# Altium PCB Плата2.PcbDoc
Units mm, origin at the board's own origin, x right, y up, seen from the top; angles counter-clockwise.
Board outline 64.1 x 28.1 mm, 2 copper layers (Top Layer, Bottom Layer); 23 components, 27 nets, 132 pads, 0 vias.
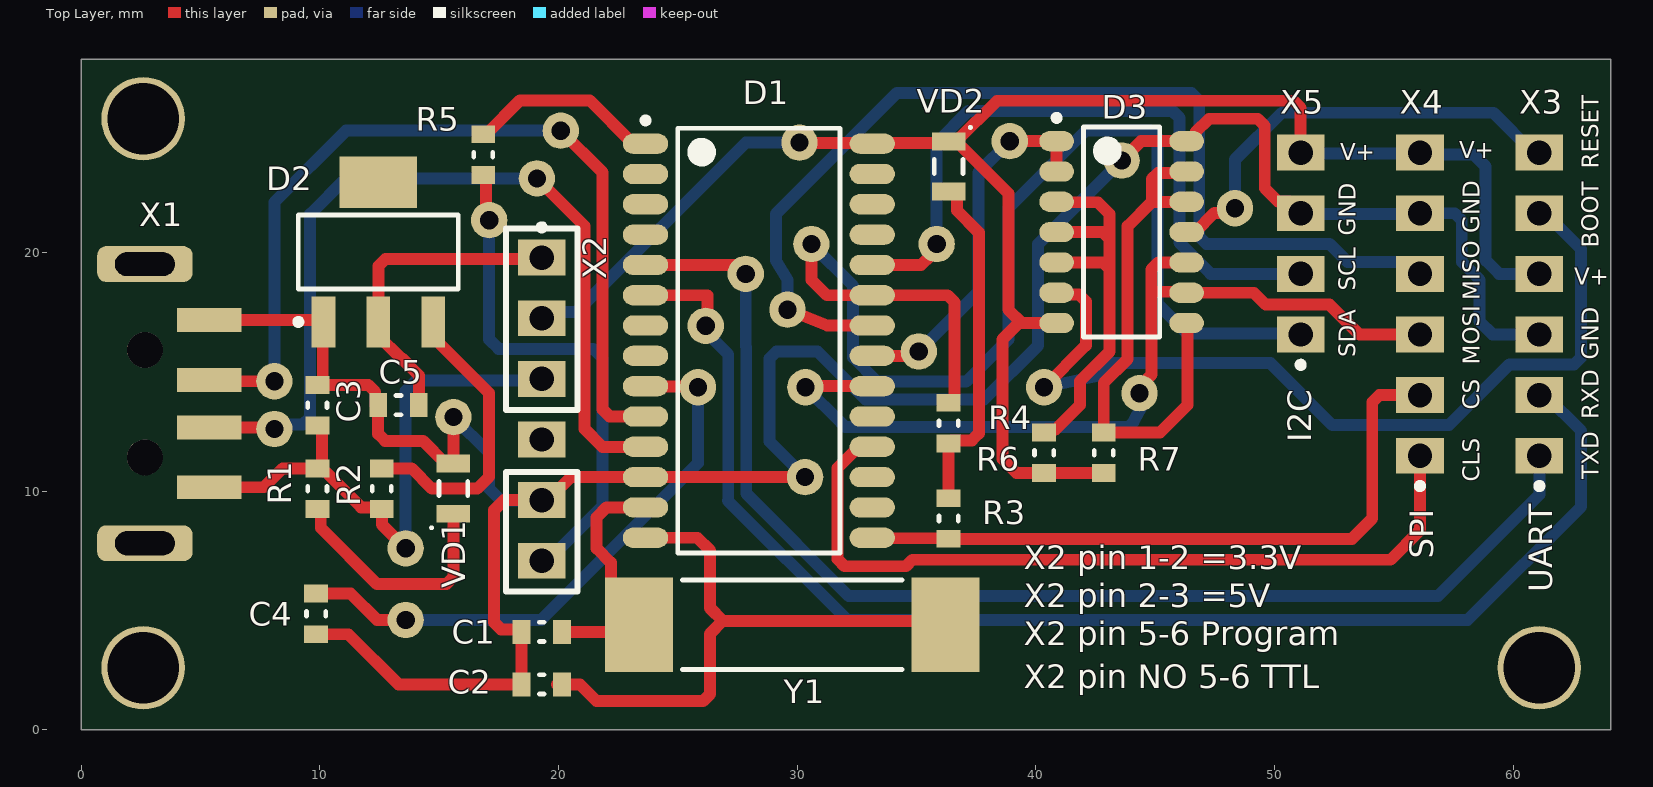
[diagram p0: Top Layer view]
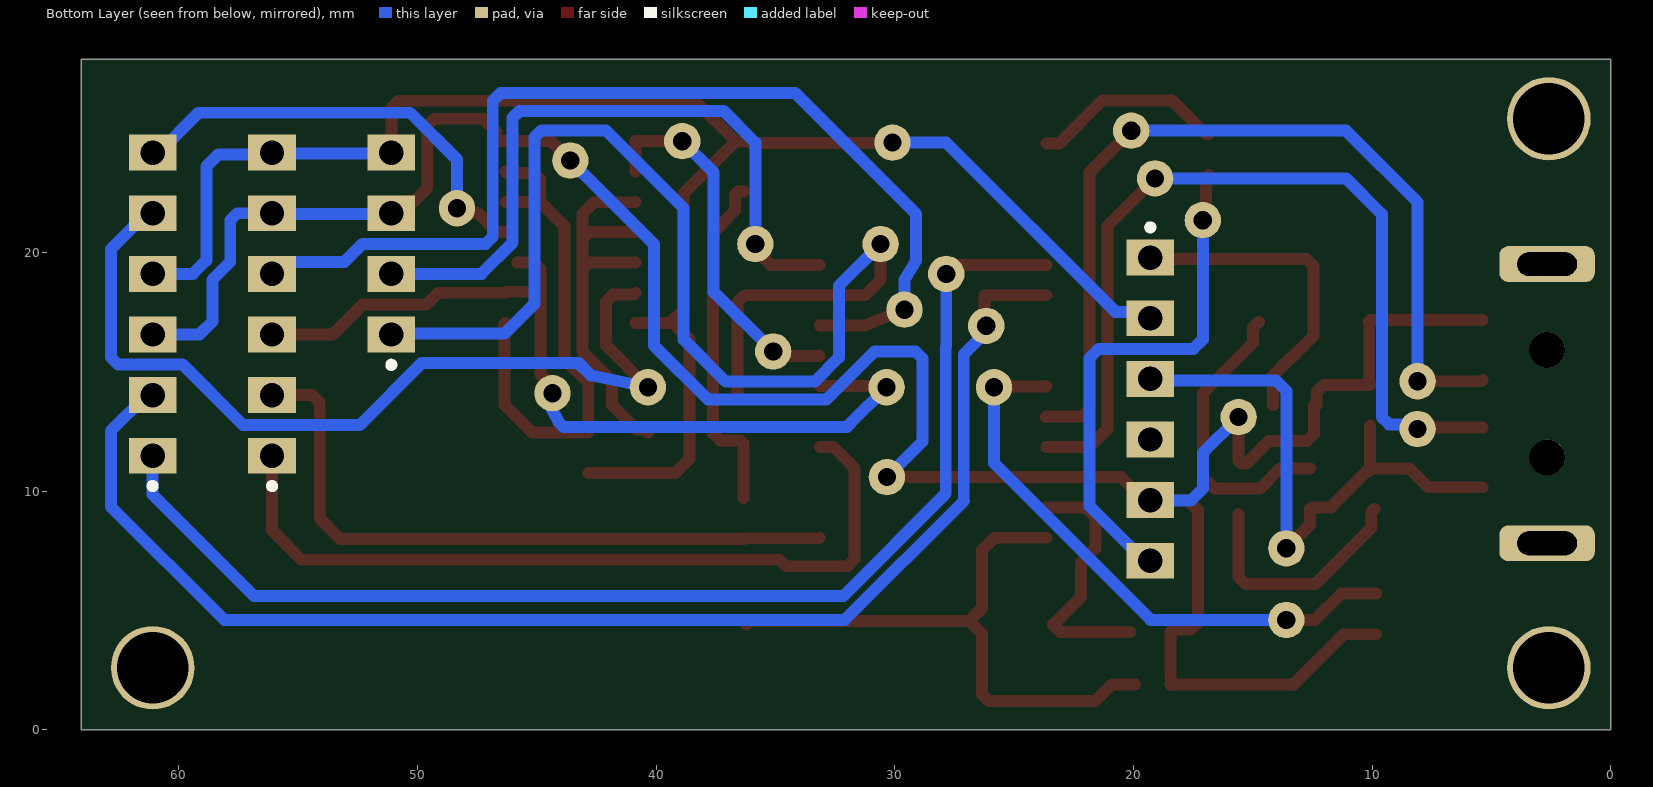
[diagram p1: Bottom Layer view, seen from below]

## Layer stack, top to bottom
Top Solder: solder mask 0.0102, Solder Resist, Dk 3.5
Top Layer: signal copper 0.0356
Dielectric 1: dielectric 0.32, FR-4, Dk 4.8
Bottom Layer: signal copper 0.0356
Bottom Solder: solder mask 0.0102, Solder Resist, Dk 3.5

## Board outline
0,0 64.1,0 64.1,28.1 0,28.1

## Design rules (kind name [scope] priority, off if disabled: settings)
Clearance [All] p1: gap=0.254 ignorepadtopadclearanceinfootprint=FALSE
PolygonConnect [All] p1: connectstyle=Relief reliefconductorwidth=0.254 reliefentries=4 polygonreliefangle="90 Angle" airgapwidth=0.254
RoutingVias [All] p1: holewidth=0.711 width=1.27 viastyle="Through Hole" minholewidth=0.711 minwidth=1.27 maxholewidth=0.711 maxwidth=1.27
SolderMaskExpansion [All] p1: expansion=0.102 istentingtop=FALSE
Width [All] p1: maxlimit=0.5 minlimit=0.5 preferedwidth=0.5 minimp=50.000000 maximp=50.000000 favimp=50.000000
30 further rules are at their usual default settings.

## Components (designator, comment, footprint, x,y, rotation, side; value= is the part's Value field where it differs from the comment)
C1 "15" 0603 19.3,4.1 r0 top
C2 "15" 0603 19.3,1.9 r0 top
C3 "0.01" 0603 9.9,13.6 r270 top
C4 "0.01" 0603 9.85,4.85 r270 top
C5 "0.01" 0603 13.3,13.6 r0 top
D1 "CH341A" SOP127-28N 28.4,16.3 r0 top
D2 "AMS1117-3.3L" SOT223-4N 12.454,20.011 r90 top
D3 "SN7400" SOP127-14N 43.6,20.85 r0 top
R1 "2.2k" 0603 9.9,10.1 r90 top
R2 "10" 0603 12.6,10.1 r90 top
R3 "2.2k" 0603 36.35,8.85 r270 top
R4 "2.2k" 0603 36.35,12.85 r90 top
R5 "2.2k" 0603 16.85,24.1 r270 top
R6 "2.2k" 0603 40.35,11.6 r270 top
R7 "2.2k" 0603 42.85,11.6 r270 top
VD1 "LED SMD 0805" "Led Diode 0805" 15.6,10.1 r90 top
VD2 "LED SMD 0805" "Led Diode 0805" 36.35,23.6 r270 top
X1 "USB" "USB-ASM (DS1098-B)" 2.675,13.661 r270 top
X2 "PLC-6" PLC-6 19.3,19.78 r270 top
X3 "UART" PLC-6 61.1,11.48 r90 top
X4 "SPI (Flash)" PLC-6 56.1,11.48 r90 top
X5 "I2C(Flash)" PLC-4 51.1,16.56 r90 top
Y1 "12МГц" HC-49SM 29.8,4.4 r0 top

## Footprints (in the part's own frame and the unit in brackets; to place one, negate y for a bottom-side part, rotate by r counter-clockwise, add the part's x,y. Pads: shape width x height; smd on the part's side, far side on the other; paste and mask are expansions set on the pad)
0603 [mm] "Chip Resistor, 2-Leads, Body 1,63x0,93mm, IPC Medium Density"
  rect 0.75x1 smd: 1(-0.85,0) 2(0.85,0)
  silkscreen extent -0.1,-0.4 0.1,0.4, body extent -0.85,-0.48 0.85,0.47, height 0.45
HC-49SM [mm] "Chip BQ"
  rect 2.85x3.95 smd: 1(-6.425,0) 2(6.425,0)
  silkscreen extent -4.6,-1.88 4.6,1.88, body extent -7.5,-1.9 7.5,1.9, height 5
"Led Diode 0805" [mm] "Chip Diode, 2-Leads, Body 2,05x1,25mm, IPC Medium Density"
  rect 0.75x1.4 smd: A(-1.05,0) K(1.05,0)
  silkscreen extent -1.69,-0.6 0.3,0.96
PLC-4 [mm]
  rect 1.5x2 hole 1.02: 1(0,0) 2(2.54,0) 3(5.08,0) 4(7.62,0)
  silkscreen extent -1.4,-0.13 -1.14,0.13
PLC-6 [mm]
  rect 1.5x2 hole 1.02: 1(0,0) 2(2.54,0) 3(5.08,0) 4(7.62,0) 5(10.16,0) 6(12.7,0)
  silkscreen extent -1.4,-0.13 -1.14,0.13
SOP127-14N [mm] "SOP, 14-Leads, Body 8,65x3,90mm, Pitch 1,27mm, IPC Medium Density"
  oval 1.45x0.85 smd: 1(-2.725,3.81) 2(-2.725,2.54) 3(-2.725,1.27) 4(-2.725,0) 5(-2.725,-1.27) 6(-2.725,-2.54) 7(-2.725,-3.81) 8(2.725,-3.81) 9(2.725,-2.54) 10(2.725,-1.27) 11(2.725,0) 12(2.725,1.27) 13(2.725,2.54) 14(2.725,3.81)
  silkscreen extent -2.85,-4.4 1.6,4.91
SOP127-28N [mm] "SOP, 28-Leads, Body 17,73x7,50mm, Pitch 1,27mm, IPC Medium Density"
  oval 1.9x0.85 smd: 1(-4.75,8.255) 2(-4.75,6.985) 3(-4.75,5.715) 4(-4.75,4.445) 5(-4.75,3.175) 6(-4.75,1.905) 7(-4.75,0.635) 8(-4.75,-0.635) 9(-4.75,-1.905) 10(-4.75,-3.175) 11(-4.75,-4.445) 12(-4.75,-5.715) 13(-4.75,-6.985) 14(-4.75,-8.255) 15(4.75,-8.255) 16(4.75,-6.985) 17(4.75,-5.715) 18(4.75,-4.445) 19(4.75,-3.175) 20(4.75,-1.905) 21(4.75,-0.635) 22(4.75,0.635) 23(4.75,1.905) 24(4.75,3.175) 25(4.75,4.445) 26(4.75,5.715) 27(4.75,6.985) 28(4.75,8.255)
  silkscreen extent -4.87,-8.9 3.4,9.35
SOT223-4N [mm] "SOT223, 4-Leads, Body 6,50x7,00mm (avg), Pitch 2,30mm, IPC Medium Density"
  rect 2.15x1 smd: 1(-2.925,2.3) 2(-2.925,0) 3(-2.925,-2.3)
  rect 2.15x3.25 smd: 4(2.925,0)
  silkscreen extent -3.05,-3.35 1.55,3.47
"USB-ASM (DS1098-B)" [mm]
  rect 1x2.7 smd: 1(3.5,2.7) 2(1,2.7) 3(-1,2.7) 4(-3.5,2.7)
  rrect50% 1.5x4 hole 1 slot 2.5 at 90 deg: 5(-5.85,0) 5(5.85,0)
  round 1.5 hole 1.5 unplated: 6(-2.25,0) 6(2.25,0)

## Part data
C1 C2 C3 C4 C5: library part C
R1 R2 R3 R4 R5 R6 R7: library part R
X3 X4: library part PLC-6
X5: library part PLC-4
Y1: library part BQ

## Free pads (board coordinates)
  round 1.524 hole 0.762: 14(13.6,7.6) 15(15.6,13.1) 16(8.1,14.6) 17(8.1,12.6) 18(20.1,25.1) 20(19.1,23.1) 21(30.1,24.6) 22(13.6,4.6) 23(25.85,14.35) 24(17.1,21.35) 25(30.35,14.35) 26(44.35,14.1) 27(30.335,10.585) 28(43.6,23.85) 29(35.1,15.85) 30(38.91,24.66) 31(35.85,20.35) 32(29.6,17.6) 33(27.85,19.1) 35(26.173,16.923) 36(30.6,20.35) 37(40.35,14.35) 38(48.35,21.85)
  round 3.5 hole 3: 39(2.6,2.6) 39(2.6,25.6) 39(61.1,2.6)

## Nets (pads, with @x,y where several pads share a name; then routed paths per layer and width w, separated by ;. In a path a pad name is that pad's centre, name@x,y a point inside that pad or via, vN(x,y) a via of type N, cw(c..) or ccw(c..) an arc to the next point about the centre after c; other vN are vias at no path point)
+3.3: C5.2 D2.2 X2.1 | length 13.5
  Top Layer w0.5: C5.2 14.15,14.85 13.446,15.554 13.411,15.554 12.454,16.511 D2.2 12.454,19.427 12.747,19.72 X2.1@19.3,19.72
+5: C3.2 pad.14 R1.2 R2.1 X1.1 X2.3 | length 24.6
  Top Layer w0.5: X1.1 7.661,10.161 8.45,10.95 R1.2 R1.2@10.1,10.95 ; C3.2@10.1,12.75 R1.2@10.1,10.95 ; pad.14 12.6,8.6 R2.1 12.532,9.318 11.732,9.318 10.225,10.825 10.15,10.825 10.1,10.875 R1.2@10.1,10.95
  Bottom Layer w0.5: pad.14 13.6,14.2 14.04,14.64 X2.3@19.3,14.64
GND: C1.1 C2.1 C3.1 C4.2 C5.1 D1.12 D2.1 D3.14 pad.15 pad.27 pad.28 VD1.K X1.4 X2.5 X3.3 X4.5 X5.3 | length 107
  Top Layer w0.5: X1.4 10.079,17.161 D2.1 10.127,17.059 10.127,14.477 10.1,14.45 12.032,14.45 12.325,14.157 C5.1@12.325,13.6 ; C4.2 11.2,4 13.3,1.9 C2.1 ; C5.1 12.45,12.393 12.743,12.1 14.325,12.1 15.275,11.15 15.475,11.15 15.6,11.275 pad.15 ; C2.1@18.45,2.225 C1.1 18.35,4.2 17.6,4.2 17.3,4.5 17.3,9.2 17.72,9.62 X2.5 19.55,9.62 20.515,10.585 D1.12 pad.27 pad.27@30.35,10.6 ; pad.28@43.85,24.1 44.41,24.66 D3.14@45.825,24.66 ; D3.14 46.53,24.66 46.692,24.822 46.692,25.027 47.265,25.6 49.303,25.6 49.596,25.307 49.596,22.687 50.143,22.14 50.619,22.14 X5.3@51.159,21.6
  Bottom Layer w0.5: pad.15 17.1,11.6 17.1,10.1 17.6,9.6 X2.5@19.3,9.6 ; pad.27 28.85,12.07 28.85,15.557 29.143,15.85 30.85,15.85 32.87,13.83 37.83,13.83 40.1,16.1 40.1,20.35 pad.28 ; X5.3@51.1,21.6 X4.5@56.1,21.6 ; X4.5 57.557,21.64 57.85,21.347 57.85,19.6 58.6,18.85 58.6,17.1 59.14,16.56 X3.3
NetC1_2: C1.2 D1.13 Y1.1 | length 10.8
  Top Layer w0.5: C1.2 23.075,4.1 Y1.1 22.2,5.575 22.2,7 21.6,7.6 21.6,8.9 22.015,9.315 D1.13
NetC2_2: C2.2 D1.14 Y1.2 | length 25.6
  Top Layer w0.5: C2.2@19.95,1.9 C2.2 20.9,1.9 21.6,1.2 26.057,1.2 26.35,1.493 26.35,4.017 26.892,4.558 ; D1.14 25.822,8.045 26.35,7.517 26.35,5.1 26.892,4.558 ; Y1.2 36.067,4.558 26.892,4.558
NetC4_1: C4.1 D1.9 pad.22 pad.23 | length 24.8
  Top Layer w0.5: C4.1 11.3,5.7 12.4,4.6 pad.22 ; D1.9 23.667,14.378 pad.23@26.1,14.378
  Bottom Layer w0.5: pad.22 19.283,4.6 25.847,11.164 25.847,11.597 25.852,11.602 25.852,14.348 pad.23
NetD1_1: D1.1 R5.1 | length 8.1
  Top Layer w0.5: R5.1 16.975,24.95 18.391,26.366 21.314,26.366 23.125,24.555 D1.1
NetD1_5: D1.5 pad.33 X3.1 | length 52
  Top Layer w0.5: D1.5 27.475,19.475 pad.33
  Bottom Layer w0.5: pad.33 27.85,16.06 27.87,16.04 27.87,9.896 32.166,5.6 56.85,5.6 61.1,9.85 X3.1
NetD1_6: D1.6 pad.35 X3.2 | length 57.1
  Top Layer w0.5: D1.6 26.245,18.205 26.245,16.995 pad.35 pad.35@26.1,16.85
  Bottom Layer w0.5: pad.35 26.173,16.671 27.116,15.728 27.116,9.616 27.1,9.6 32.1,4.6 58.1,4.6 62.85,9.35 62.85,12.52 61.35,14.02 X3.2
NetD1_10: D1.10 pad.16 pad.18 X1.3 | length 38.3
  Top Layer w0.5: X1.3 5.436,14.6 pad.16 ; pad.18 21.854,23.346 21.854,13.418 22.147,13.125 D1.10 D1.10@23.675,13.1
  Bottom Layer w0.5: pad.16 8.1,22.1 11.1,25.1 pad.18 19.927,24.946 pad.18@19.722,24.946
NetD1_11: D1.11 pad.17 pad.20 X1.2 | length 37.3
  Top Layer w0.5: X1.2 8.039,12.661 pad.17 ; pad.20 21.1,21.1 21.1,13.416 21.096,13.412 21.096,12.788 21.1,12.784 21.1,12.6 21.845,11.855 D1.11
  Bottom Layer w0.5: pad.17 8.296,12.796 9.296,12.796 9.6,13.1 9.6,21.6 11.1,23.1 pad.20
NetD1_15: D1.15 R3.2 X4.2 | length 28.3
  Top Layer w0.5: D1.15 33.172,8.023 36.328,8.023 R3.2 53.25,8 54.1,8.85 54.1,13.727 54.393,14.02 X4.2
NetD1_18: D1.18 X4.1 | length 33.7
  Top Layer w0.5: D1.18 32.581,11.855 31.696,10.97 31.696,7.143 31.989,6.85 34.562,6.85 34.833,7.121 54.871,7.121 56.1,8.35 56.1,10.98 56.22,11.1 X4.1@56.35,11.1
NetD1_20: D1.20 D3.9 D3.10 pad.25 pad.26 X4.3 | length 36.8
  Top Layer w0.5: pad.25@30.6,14.35 30.645,14.395 D1.20 ; pad.26 44.35,14.377 44.85,14.877 44.85,18.35 ; D3.10@45.825,19.58 45.143,19.58 44.85,19.287 44.85,18.35 ; X4.3 53.563,16.56 52.309,17.814 49.636,17.814 49.14,18.31 D3.9 46.285,18.35 44.85,18.35
  Bottom Layer w0.5: pad.25 31.864,12.836 32.011,12.689 43.89,12.689 44.091,12.89 44.451,13.578 pad.26@44.451,13.777 ; pad.26 pad.26@44.564,13.897
NetD1_21: D1.21 D3.1 D3.2 pad.29 pad.30 | length 15.7
  Top Layer w0.5: D1.21 35.035,15.665 pad.29@35.1,15.6 ; pad.30@38.85,24.6 pad.30 D3.1 D3.2
  Bottom Layer w0.5: pad.29 37.6,18.35 37.6,23.35 pad.30
NetD1_22: D1.22 pad.32 X4.4 | length 43.4
  Top Layer w0.5: pad.32 31.265,16.935 D1.22
  Bottom Layer w0.5: pad.32 29.6,18.85 29.116,19.657 29.116,21.616 34.18,26.68 46.52,26.68 46.85,26.35 46.85,20.647 47.143,20.354 52.309,20.354 53.063,19.6 55.6,19.6 X4.4
NetD1_23: D1.23 pad.36 R4.2 X5.1 | length 51.3
  Top Layer w0.5: pad.36@30.6,20.1 30.6,18.85 31.245,18.205 D1.23 36.307,18.205 36.6,17.912 36.6,14.102
  Bottom Layer w0.5: pad.36 32.35,18.6 32.35,15.6 33.366,14.584 37.084,14.584 38.85,16.35 38.85,21.85 42.116,25.116 44.807,25.116 45.1,24.823 45.1,17.85 46.35,16.6 51.06,16.6 X5.1
NetD1_24: D1.24 pad.31 X5.2 | length 29.1
  Top Layer w0.5: D1.24 35.198,19.475 35.573,19.85 pad.31
  Bottom Layer w0.5: pad.31 35.85,24.6 37.176,25.926 45.731,25.926 46.024,25.633 46.024,20.407 47.331,19.1 X5.2
NetD2_3: D2.3 R2.2 | length 12.5
  Top Layer w0.5: R2.2 13.85,10.95 14.7,10.1 16.6,10.1 17.1,10.6 17.1,14.1 15.004,16.196 15.004,16.836 D2.3
NetD3_3: D3.3 D3.4 D3.5 R6.1 | length 17.6
  Top Layer w0.5: R6.1 40.475,12.575 40.825,12.575 41.85,13.6 41.85,14.6 43.096,15.846 43.096,19.287 ; D3.5 42.803,19.58 43.096,19.287 ; D3.4 42.803,20.85 43.096,20.557 ; D3.3 40.895,22.1 42.6,22.1 43.096,21.604 43.096,20.557 ; 43.096,19.287 43.096,20.557
NetD3_6: D3.6 pad.37 X3.5 | length 37.6
  Top Layer w0.5: pad.37 42.104,16.104 42.104,17.946 41.807,18.243 40.942,18.243 D3.6
  Bottom Layer w0.5: pad.37 42.743,14.85 43.259,15.366 49.831,15.366 52.431,12.766 57.309,12.766 59.849,15.306 62.557,15.306 62.85,15.599 62.85,20.14 61.35,21.64 X3.5
NetD3_8: D3.8 D3.12 D3.13 R7.1 | length 21.9
  Top Layer w0.5: D3.8 46.35,17.015 46.35,13.6 45.2,12.45 R7.1 42.85,14.534 43.85,15.534 43.85,21.1 44.87,22.12 ; D3.12 44.87,22.12 ; D3.13 46.258,23.323 45.113,23.323 44.87,23.08 44.87,22.12
NetD3_11: D3.11 pad.38 X3.6 | length 18.7
  Top Layer w0.5: D3.11 46.679,20.85 47.483,21.654 48.154,21.654 pad.38
  Bottom Layer w0.5: pad.38 48.35,23.893 50.307,25.85 59.18,25.85 60.85,24.18 X3.6
NetR1_1: R1.1 VD1.A | length 10.2
  Top Layer w0.5: R1.1 9.918,9.25 10.043,9.125 10.043,8.457 12.4,6.1 15.307,6.1 15.6,6.393 VD1.A
NetR3_1: R3.1 R4.1 VD2.K | length 14.5
  Top Layer w0.5: R3.1 R4.1 36.475,12.125 37.325,12.125 37.618,12.418 37.618,20.832 36.693,21.757 36.693,22.425 36.568,22.55 VD2.K
NetR5_2: pad.24 R5.2 X2.6 | length 21.5
  Top Layer w0.5: R5.2 16.975,23.125 16.975,21.475 pad.24
  Bottom Layer w0.5: pad.24@17.1,21.1 17.1,16.35 17.496,15.954 21.453,15.954 21.85,15.557 21.85,9.38 19.55,7.08 X2.6
VCC: D1.28 D3.7 pad.21 R6.2 R7.2 VD2.A X2.2 X3.4 X4.6 X5.4 | length 72.5
  Top Layer w0.5: pad.21 30.123,24.578 VD2.A@36.028,24.578 ; VD2.A VD2.A@36.675,24.65 ; D3.7 39.41,17.04 ; R7.2 R6.2 39.2,10.75 38.6,11.35 38.6,16.35 39.29,17.04 39.41,17.04 ; X5.4 51.1,26.057 50.803,26.354 38.379,26.354 VD2.A@36.675,24.65 ; VD2.A@36.675,24.65 38.85,22.475 38.85,17.6 39.41,17.04
  Bottom Layer w0.5: X2.2 19.567,17.507 20.757,17.507 27.85,24.6 pad.21 ; X5.4@51.1,24.14 X4.6@56.1,24.14 ; X4.6 56.18,24.1 58.35,24.1 58.85,23.6 58.85,19.666 59.416,19.1 X3.4
pads on no net: D1.2 D1.3 D1.4 D1.7 D1.8 D1.16 D1.17 D1.19 D1.25 D1.26 D1.27 D2.4 X1.5 X1.6 X2.4

## Silkscreen, mask and mechanical layers (free items; w line width, h text height)
Top Overlay:
  lines w0.254: 17.8,5.8 20.8,5.8 20.8,10.8 17.8,10.8 17.8,5.8 ; 17.8,13.4 20.8,13.4 20.8,21 17.8,21 17.8,13.4
  text "V+" at 57.754,23.954 h0.7
  text "V+" at 52.754,23.854 h0.7
  text "RESET" at 63.6,23.5 h0.7 r90
  text "GND" at 58.6,20.8 h0.7 r90
  text "GND" at 53.4,20.7 h0.7 r90
  text "BOOT" at 63.6,20.2 h0.7 r90
  text "V+" at 62.554,18.654 h0.7
  text "SCL" at 53.4,18.4 h0.7 r90
  text "MISO" at 58.6,18 h0.7 r90
  text "SDA" at 53.4,15.6 h0.7 r90
  text "GND" at 63.6,15.5 h0.7 r90
  text "MOSI" at 58.6,15.3 h0.7 r90
  text "CS" at 58.6,13.4 h0.7 r90
  text "RXD" at 63.6,13 h0.7 r90
  text "I2C" at 51.546,12.054 h1 r90
  text "TXD" at 63.6,10.5 h0.7 r90
  text "CLS" at 58.6,10.4 h0.7 r90
  text "SPI" at 56.646,7.154 h1 r90
  text "X2 pin 1-2 =3.3V" at 39.5,6.733 h1
  text "UART" at 61.646,5.754 h1 r90
  text "X2 pin 2-3 =5V" at 39.5,5.133 h1
  text "X2 pin 5-6 Program" at 39.5,3.533 h1
  text "X2 pin NO 5-6 TTL" at 39.5,1.733 h1